# Altium PCB PCB.PcbDoc
Units mm, origin at the board's own origin, x right, y up, seen from the top; angles counter-clockwise.
Board outline 29.72 x 25.27 mm, 2 copper layers (Top Layer, Bottom Layer); 6 components, 8 nets, 24 pads, 3 vias.
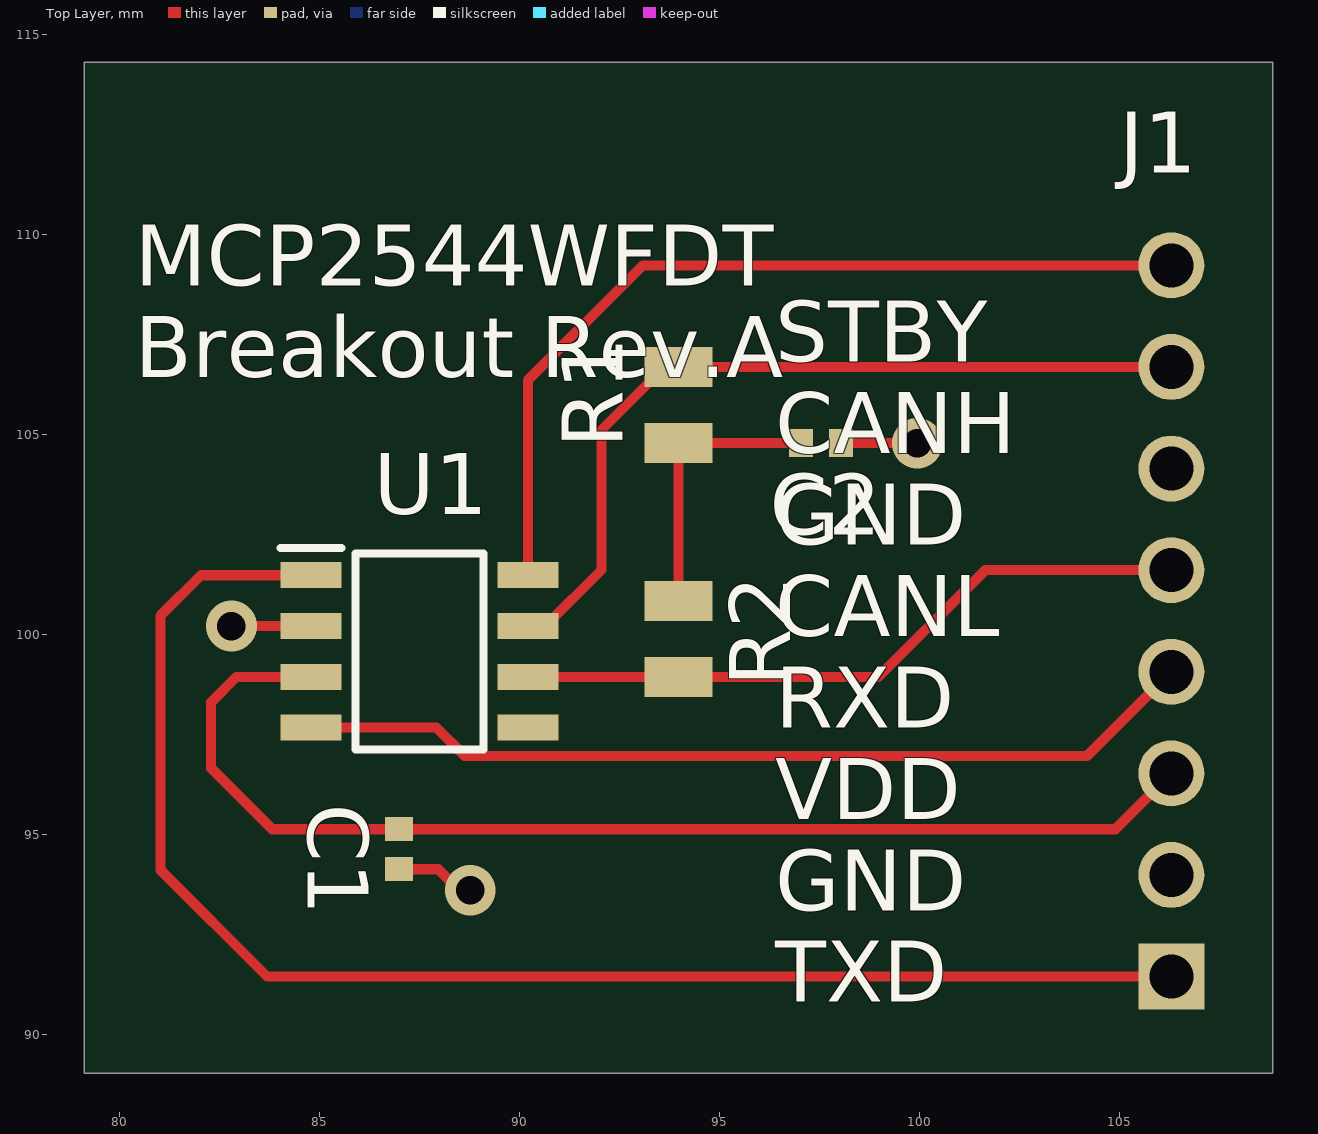
[diagram p0: Top Layer view]
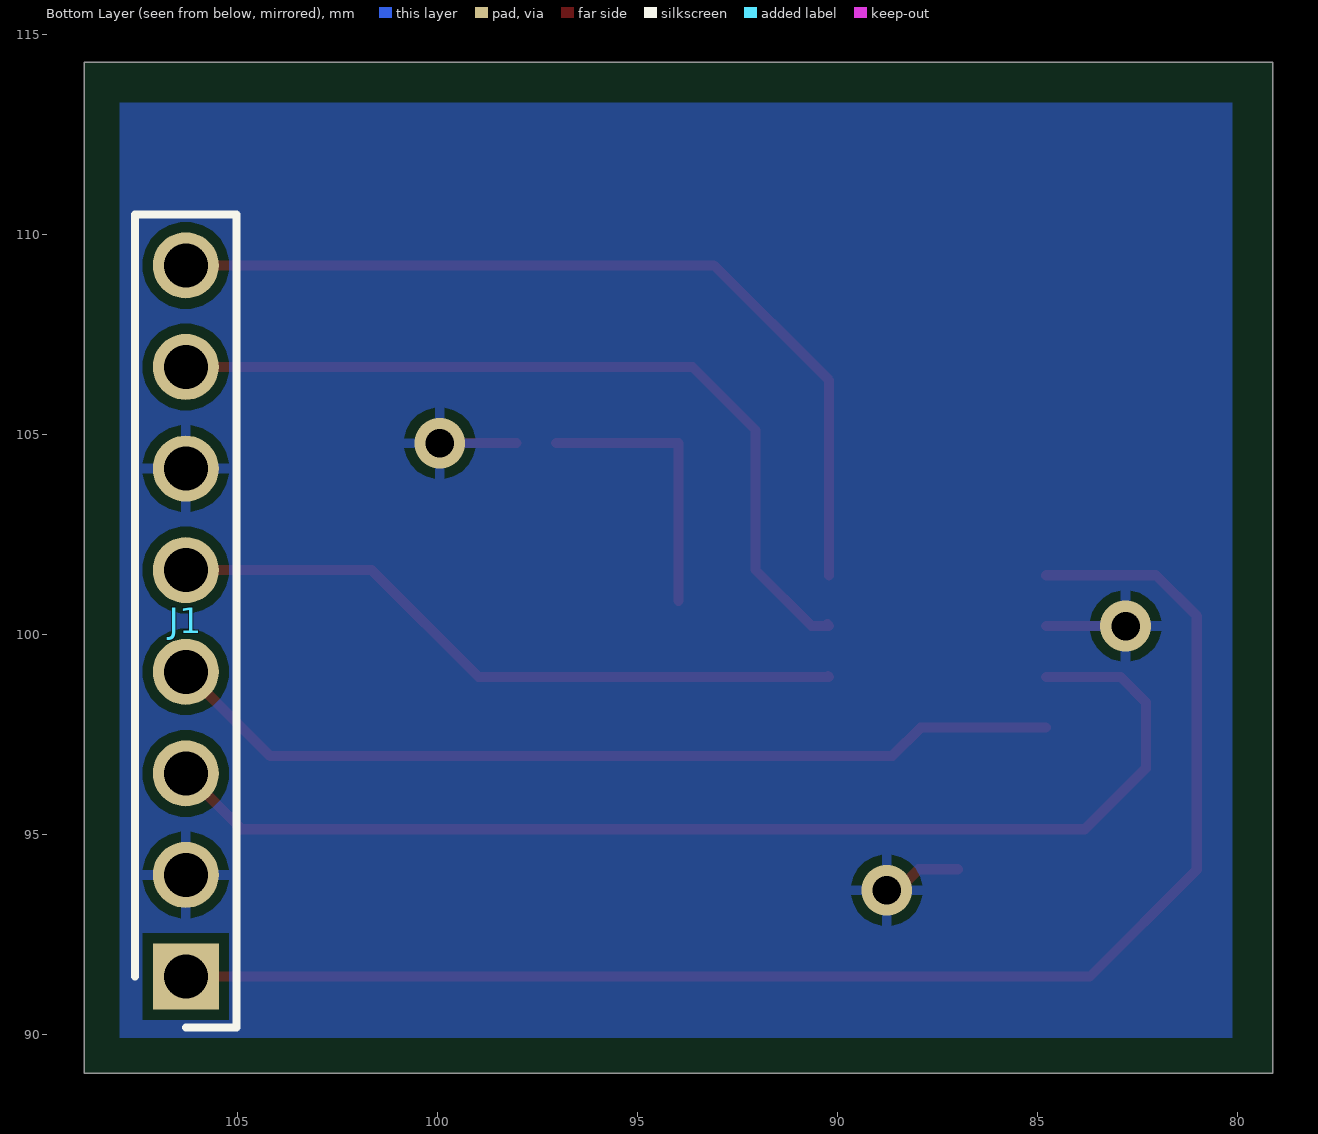
[diagram p1: Bottom Layer view, seen from below]
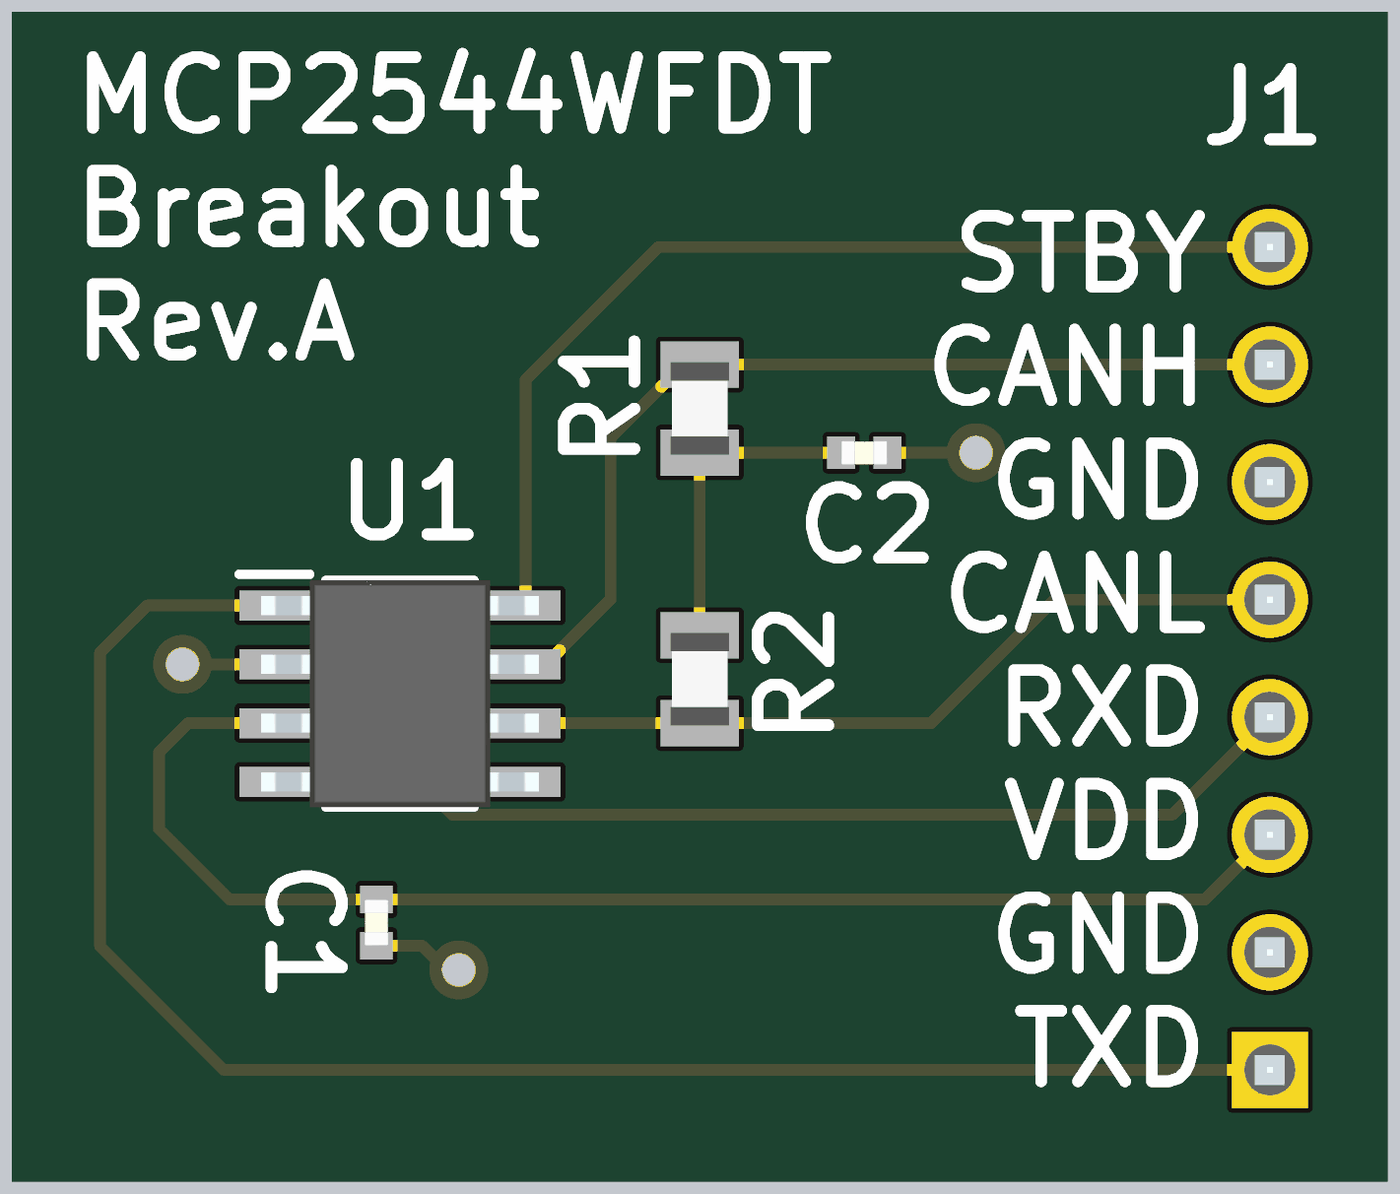
[diagram p2: 3D render of the assembled board from above, using the file's embedded part models]

## Layer stack, top to bottom
Top Solder: solder mask 0.0102, Solder Resist, Dk 3.5
Top Layer: signal copper 0.0356
Dielectric 1: dielectric 0.32, FR-4, Dk 4.8
Bottom Layer: signal copper 0.0356
Bottom Solder: solder mask 0.0102, Solder Resist, Dk 3.5

## Board outline
79.121,89.027 79.121,114.3 108.839,114.3 108.839,89.027

## Design rules (kind name [scope] priority, off if disabled: settings)
Clearance [All] p1: gap=0.254 ignorepadtopadclearanceinfootprint=FALSE except(0: Arc-Hole Track-Hole SMDPad-Hole THPad-Hole Via-Hole Fill-Hole Poly-Hole Region-Hole Text-Hole)
PolygonConnect [All] p1: connectstyle=Relief reliefconductorwidth=0.254 reliefentries=4 polygonreliefangle="90 Angle" airgapwidth=0.254
RoutingVias [All] p1: holewidth=0.711 width=1.27 viastyle="Through Hole" minholewidth=0.711 minwidth=1.27 maxholewidth=0.711 maxwidth=1.27
SolderMaskExpansion [All] p1: expansion=0.102 istentingtop=FALSE
Width [All] p1: maxlimit=0.254 minlimit=0.254 preferedwidth=0.254
30 further rules are at their usual default settings.

## Components (designator, comment, footprint, x,y, rotation, side; value= is the part's Value field where it differs from the comment)
C1 "0.1u" CAP_0402 86.995,94.623 r270 top
C2 "4700p" CAP_0402 97.536,104.775 r0 top
J1 "MOLEX,_C-GRID_III,_90120,_8_WAY,_1_ROW,_STRAIGHT_PIN_HEADER" HDRV8W65P0X254_1X8_2010X249X945P 106.299,91.44 r90 bottom (schematic designator J?)
R1 "60" RES_0805 93.98,105.73 r90 top
R2 "60" RES_0805 93.98,99.883 r90 top
U1 "MCP2544WFDT-E_SN" SOIC127P600X175-8N 87.503,99.568 r0 top

## Footprints (in the part's own frame and the unit in brackets; to place one, negate y for a bottom-side part, rotate by r counter-clockwise, add the part's x,y. Pads: shape width x height; smd on the part's side, far side on the other; paste and mask are expansions set on the pad)
CAP_0402 [mm]
  rect 0.6x0.7 smd: 1(-0.5,0) 2(0.5,0)
  body extent -0.5,-0.26 0.5,0.26, height 0.37
HDRV8W65P0X254_1X8_2010X249X945P [mm]
  rect 1.65x1.65 hole 1.1: 1(0,0)
  round 1.65 hole 1.1: 2(2.54,0) 3(5.08,0) 4(7.62,0) 5(10.16,0) 6(12.7,0) 7(15.24,0) 8(17.78,0)
  silkscreen extent -1.27,-1.27 19.05,1.27, body extent -1.16,-1.25 18.94,1.24, height 9.45
RES_0805 [mm]
  rect 1x1.7 smd: 1(-0.95,0) 2(0.95,0)
  body extent -1,-0.63 1,0.63, height 0.47
SOIC127P600X175-8N [mm]
  rect 1.525x0.65 smd: 1(-2.712,1.905) 2(-2.712,0.635) 3(-2.712,-0.635) 4(-2.712,-1.905) 5(2.712,-1.905) 6(2.712,-0.635) 7(2.712,0.635) 8(2.712,1.905)
  silkscreen extent -3.47,-2.45 1.6,2.58, body extent -3,-2.45 3,2.45, height 1.75

## Part data
C1 C2: library part CAP_0402_10V, "Capacitor SMD 0402 10V"
J1: "Connector", Manufacturer_Name=Molex, Manufacturer_Part_Number=MOLEX, Datasheet Link=https://www.molex.com/pdm_docs/sd/901200128_sd.pdf, Height=9.45mm
R1 R2: library part RES_0805, "Resistor SMD 0805"
U1: "Integrated Circuit", Arrow Part Number=MCP2544WFDT-E/SN, Manufacturer_Name=Microchip, Mouser Part Number=579-MCP2544WFDT-E/SN, Arrow Price/Stock=https://www.arrow.com/en/products/mcp2544wfdt-esn/microchip-technology?region=nac, Datasheet Link=https://ww1.microchip.com/downloads/aemDocuments/documents/APID/ProductDocuments/DataSheets/MCP2542FD-MCP2542WFD-4WFD-Data-Sheet-DS20005514C.pdf, Height=1.75mm, Manufacturer_Part_Number=MCP2544WFDT-E/SN, Mouser Price/Stock=https://www.mouser.co.uk/ProductDetail/Microchip-Technology-Atmel/MCP2544WFDT-E-SN?qs=qdgZG5p0FZ4T7O4Xjw%2FO1Q%3D%3D

## Via types
v1: diameter 1.27, hole 0.711, Top Layer to Bottom Layer, tented both sides, 3 vias

## Nets (pads, with @x,y where several pads share a name; then routed paths per layer and width w, separated by ;. In a path a pad name is that pad's centre, name@x,y a point inside that pad or via, vN(x,y) a via of type N, cw(c..) or ccw(c..) an arc to the next point about the centre after c; other vN are vias at no path point)
CANH: J1.7 R1.2 U1.7 | length 20.9
  Top Layer w0.254: U1.7@90.261,100.249 U1.7 90.653,100.203 92.054,101.604 92.054,105.104 93.63,106.68 R1.2 J1.7
CANL: J1.5 R2.1 U1.6 | length 17.2
  Top Layer w0.254: U1.6@90.239,98.957 U1.6 R2.1 98.979,98.933 101.646,101.6 J1.5
GND: C1.2 C2.2 J1.2 J1.6 U1.2 | length 6.1
  Top Layer w0.254: v1(82.804,100.203) U1.2 ; C1.2 87.974,94.123 88.498,93.599 v1(88.773,93.599) ; C2.2 v1(99.949,104.775) ; J1.2@106.236,93.916 J1.2@106.34,94.021 ; J1.6@106.236,104.203 J1.6
NetC2_1: C2.1 R1.1 R2.2 | length 7
  Top Layer w0.254: R2.2 R1.1 93.985,104.775 C2.1
RXD: J1.4 U1.4 | length 22.9
  Top Layer w0.254: U1.4 87.928,97.663 88.634,96.957 104.196,96.957 J1.4 J1.4@106.172,98.933
STBY: J1.8 U1.8 | length 22.1
  Top Layer w0.254: U1.8 90.215,106.344 93.091,109.22 J1.8
TXD: J1.1 U1.1 | length 36.9
  Top Layer w0.254: U1.1 82.042,101.473 81.026,100.457 81.026,94.107 83.693,91.44 J1.1
VDD: C1.1 J1.3 U1.3 | length 29.6
  Top Layer w0.254: U1.3 82.931,98.933 82.296,98.298 82.296,96.647 83.82,95.123 C1.1 104.902,95.123 J1.3
pads on no net: U1.5

## Polygon pours and split planes (outlines as drawn)
GND on Bottom Layer "GND_L02_P000" (solid, pour order 0): 80.137,113.284 80.137,89.916 107.95,89.916 107.95,113.284

## Silkscreen, mask and mechanical layers (free items; w line width, h text height)
Top Overlay:
  text "MCP2544WFDT / Breakout Rev.A" at 80.391,106.426 h1.52
  text "STBY / CANH / GND / CANL / RXD / VDD / GND / TXD" at 96.396,90.805 h1.52
Mechanical 1:
  the board outline again, w0.254